# Altium PCB PCB_Smoothing_2022-05-04.pcbdoc
Units mm, origin at the board's own origin, x right, y up, seen from the top; angles counter-clockwise.
Board outline 59.18 x 53.85 mm, 2 copper layers (Top Layer, Bottom Layer); 5 components, 6 nets, 16 pads, 0 vias.
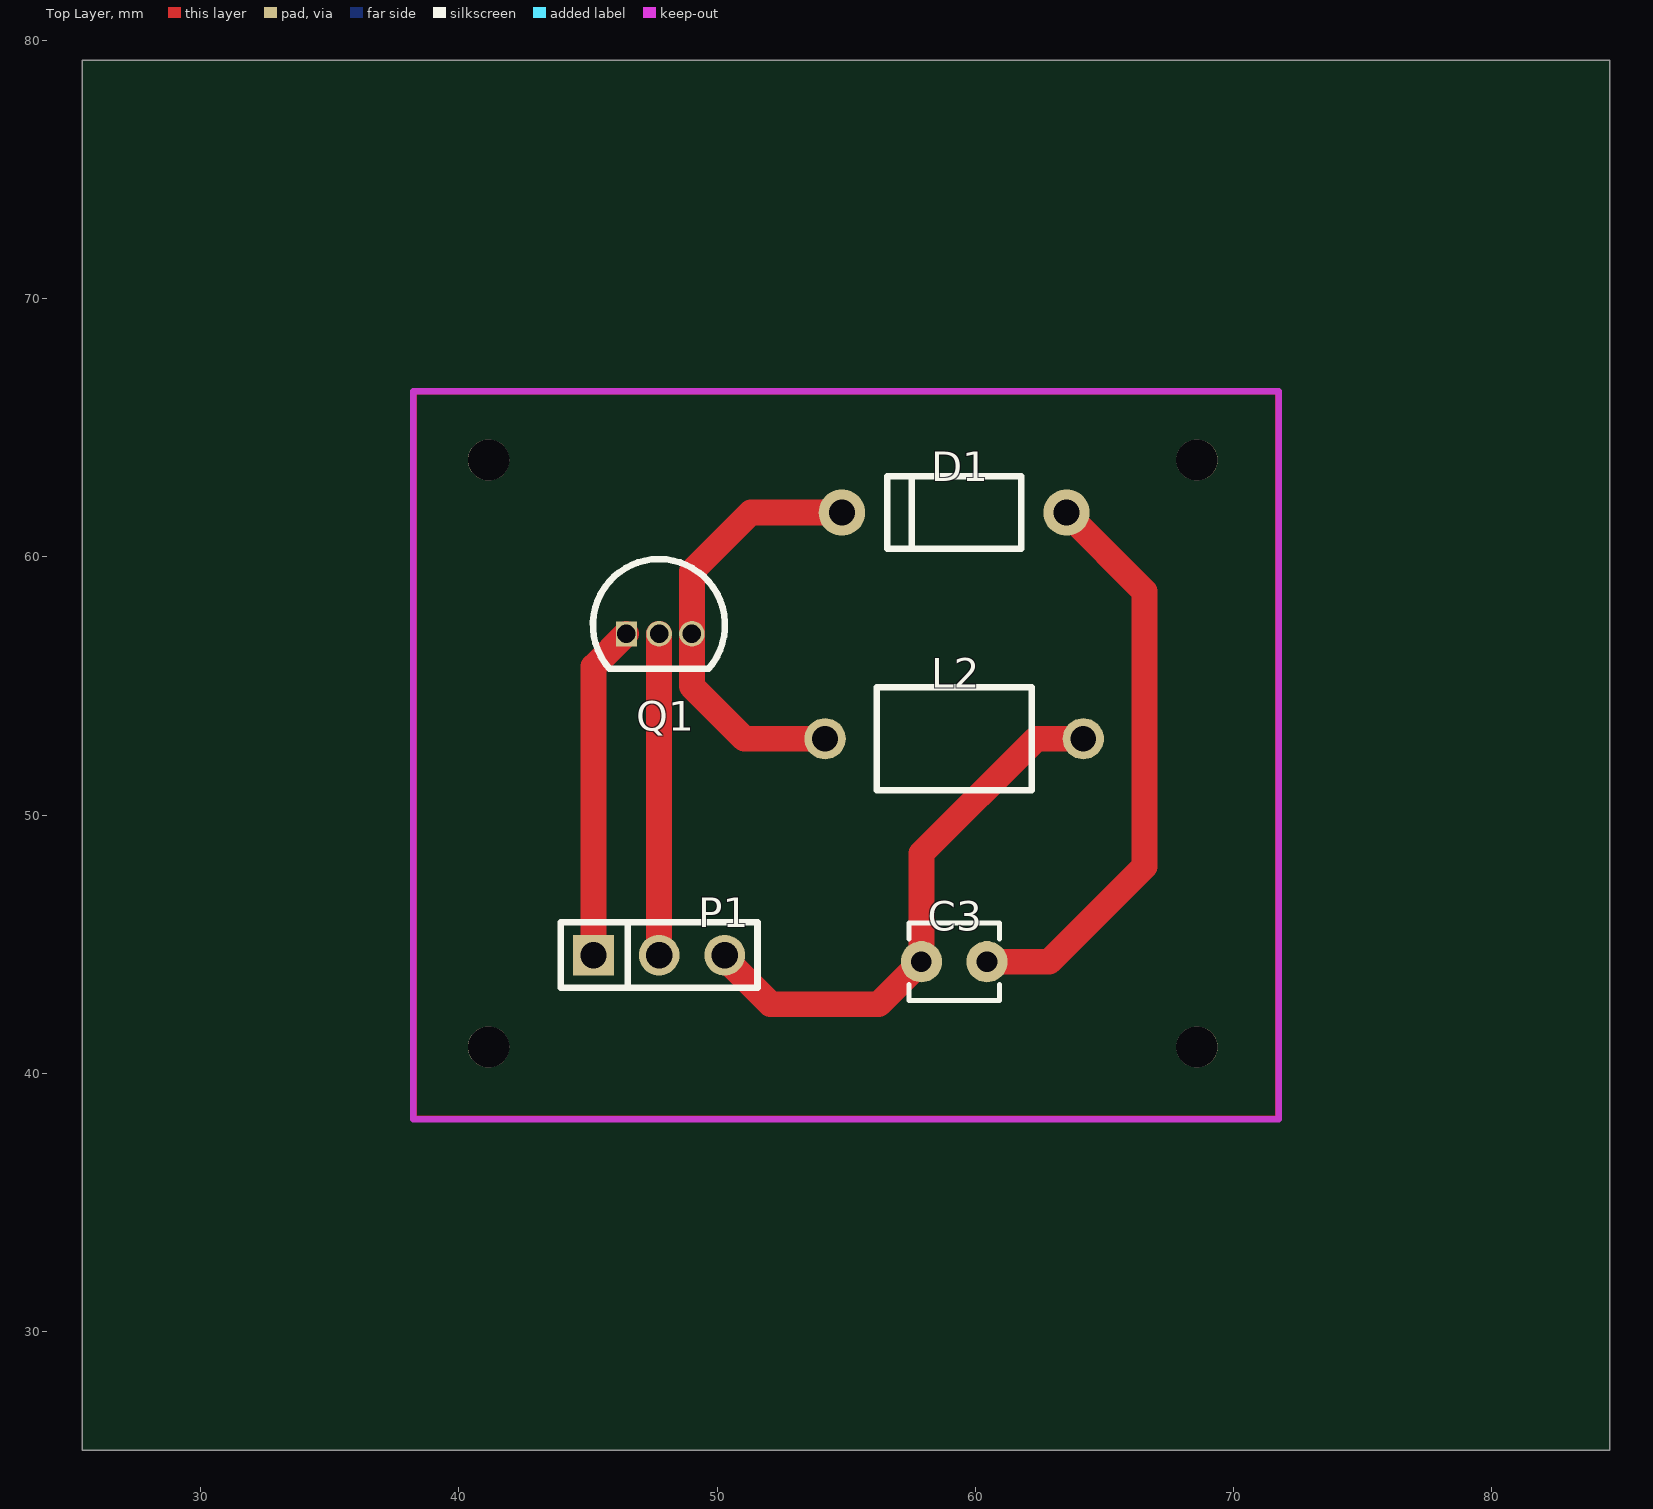
[diagram p0: Top Layer view]
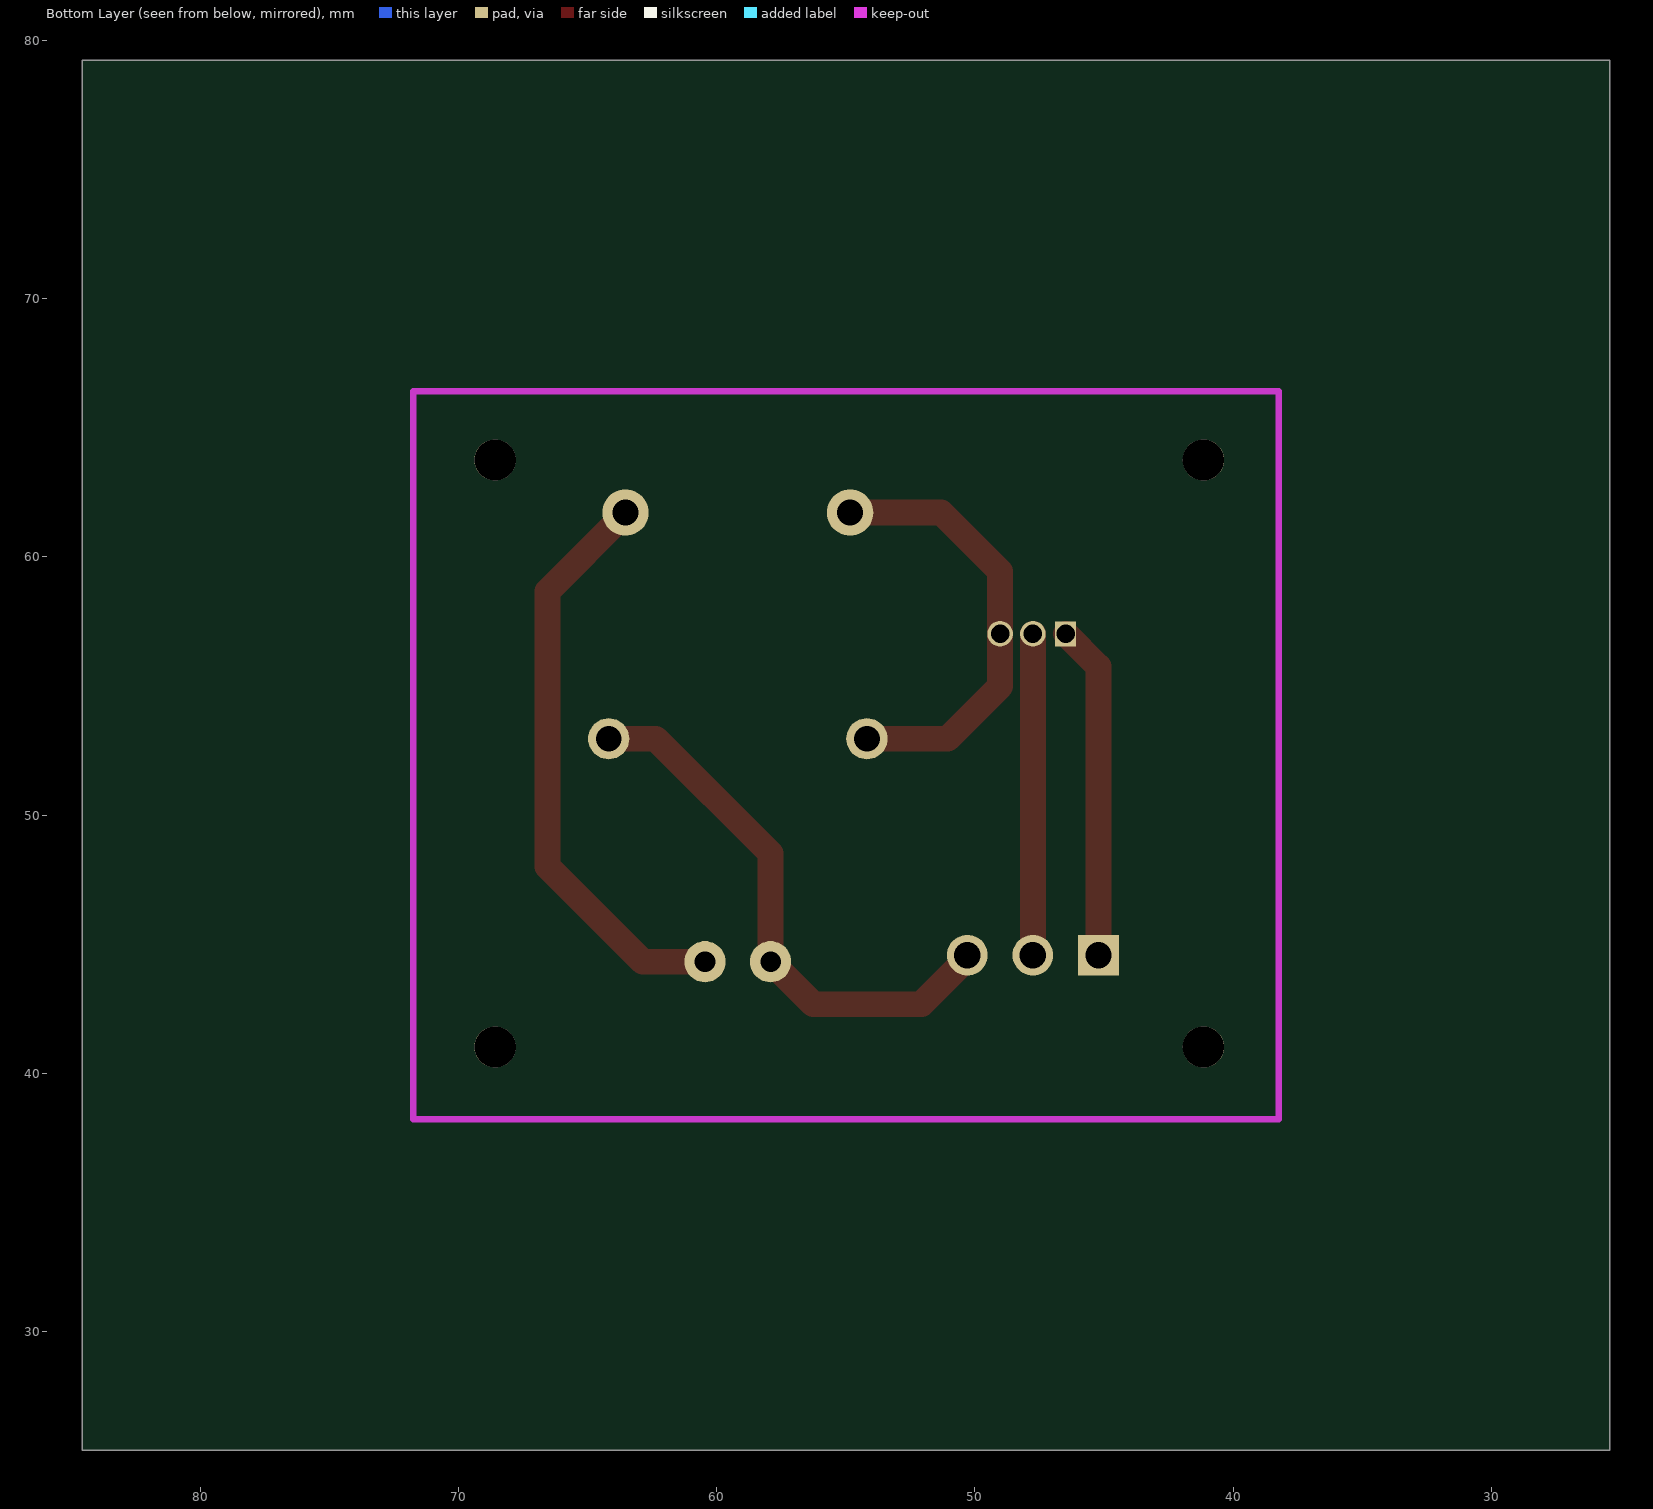
[diagram p1: Bottom Layer view, seen from below]

## Layer stack, top to bottom
Top Layer: signal copper (thickness not stored)
Dielectric: dielectric 0.32, FR-4, Dk 4.8
Bottom Layer: signal copper (thickness not stored)

## Board outline
84.582,25.4 25.4,25.4 25.4,79.248 84.582,79.248

## Components (designator, comment, footprint, x,y, rotation, side; value= is the part's Value field where it differs from the comment)
C3 "10nF" CAP-TH_L3.5-W3.0-P2.54-D0.8 59.182,44.323 r180 top
D1 "1N5819" DO-41_BD2.4-L4.7-P8.70-D0.9-RD 59.182,61.722 r0 top
L2 "10uH" IND-TH_BD4.0-L6.0-P10.00-D0.5 59.182,52.959 r0 top
P1 "Header-Female-2.54_1x3" HDR-TH_3P-P2.54-V-F 47.752,44.577 r0 top
Q1 "BC547" TO-92 47.752,57.023 r0 top

## Footprints (in the part's own frame and the unit in brackets; to place one, negate y for a bottom-side part, rotate by r counter-clockwise, add the part's x,y. Pads: shape width x height; smd on the part's side, far side on the other; paste and mask are expansions set on the pad)
CAP-TH_L3.5-W3.0-P2.54-D0.8 [mm]
  round 1.6 hole 0.8: 1(-1.27,0) 2(1.27,0)
  silkscreen extent -1.75,-1.5 1.75,1.5
DO-41_BD2.4-L4.7-P8.70-D0.9-RD [mm]
  round 1.8 hole 1: 1(-4.35,0) 2(4.35,0)
  silkscreen extent -2.6,-1.4 2.6,1.4
HDR-TH_3P-P2.54-V-F [mil]
  rect 62x62 hole 40.16: 1(-100,0)
  round 62 hole 40.16: 2(0,0) 3(100,0)
  silkscreen extent -150,-50 150,50
IND-TH_BD4.0-L6.0-P10.00-D0.5 [mm]
  round 1.6 hole 1: 1(-5,0) 2(5,0)
  silkscreen extent -3,-2 3,2
TO-92 [mil]
  rect 32x38 hole 28: 1(-50,0)
  round 39 hole 28: 2(0,0) 3(50,0)
  silkscreen extent -101,-53 100,114

## Free pads (board coordinates)
  round 1.6 hole 1.6: 2(41.148,41.021) 2(41.148,63.754) 2(68.58,41.021) 2(68.58,63.754)

## Nets (pads, with @x,y where several pads share a name; then routed paths per layer and width w, separated by ;. In a path a pad name is that pad's centre, name@x,y a point inside that pad or via, vN(x,y) a via of type N, cw(c..) or ccw(c..) an arc to the next point about the centre after c; other vN are vias at no path point)
D1_1: D1.1 L2.1 Q1.3 | length 17.2
  Top Layer w1: L2.1@54.182,52.959 51.054,52.959 49.022,54.991 Q1.3 49.022,59.436 51.308,61.722 D1.1
D1_2: C3.1 D1.2 | length 22.6
  Top Layer w1: C3.1 62.865,44.323 66.548,48.006 66.548,58.674 63.533,61.689 D1.2
GND: 
P1_1: P1.1 Q1.1 | length 13
  Top Layer w1: P1.1 45.212,55.753 Q1.1
P1_2: P1.2 Q1.2 | length 12.4
  Top Layer w1: P1.2 Q1.2
P1_3: C3.2 L2.2 P1.3 | length 21.5
  Top Layer w1: P1.3 50.292,44.45 52.07,42.672 56.261,42.672 C3.2 57.912,48.514 62.357,52.959 L2.2@64.183,52.959

## Polygon pours and split planes (outlines as drawn)
GND on Top Layer (solid): 38.354,66.294 38.354,38.354 71.628,38.354 71.628,66.294